# Altium PCB PCB_Dispositivo.PcbDoc
Units mm, origin at the board's own origin, x right, y up, seen from the top; angles counter-clockwise.
Board outline 32.26 x 64.01 mm, 2 copper layers (Top Layer, Bottom Layer); 12 components, 12 nets, 87 pads, 14 vias.
Unrouted connection lines stored in the file: 1.
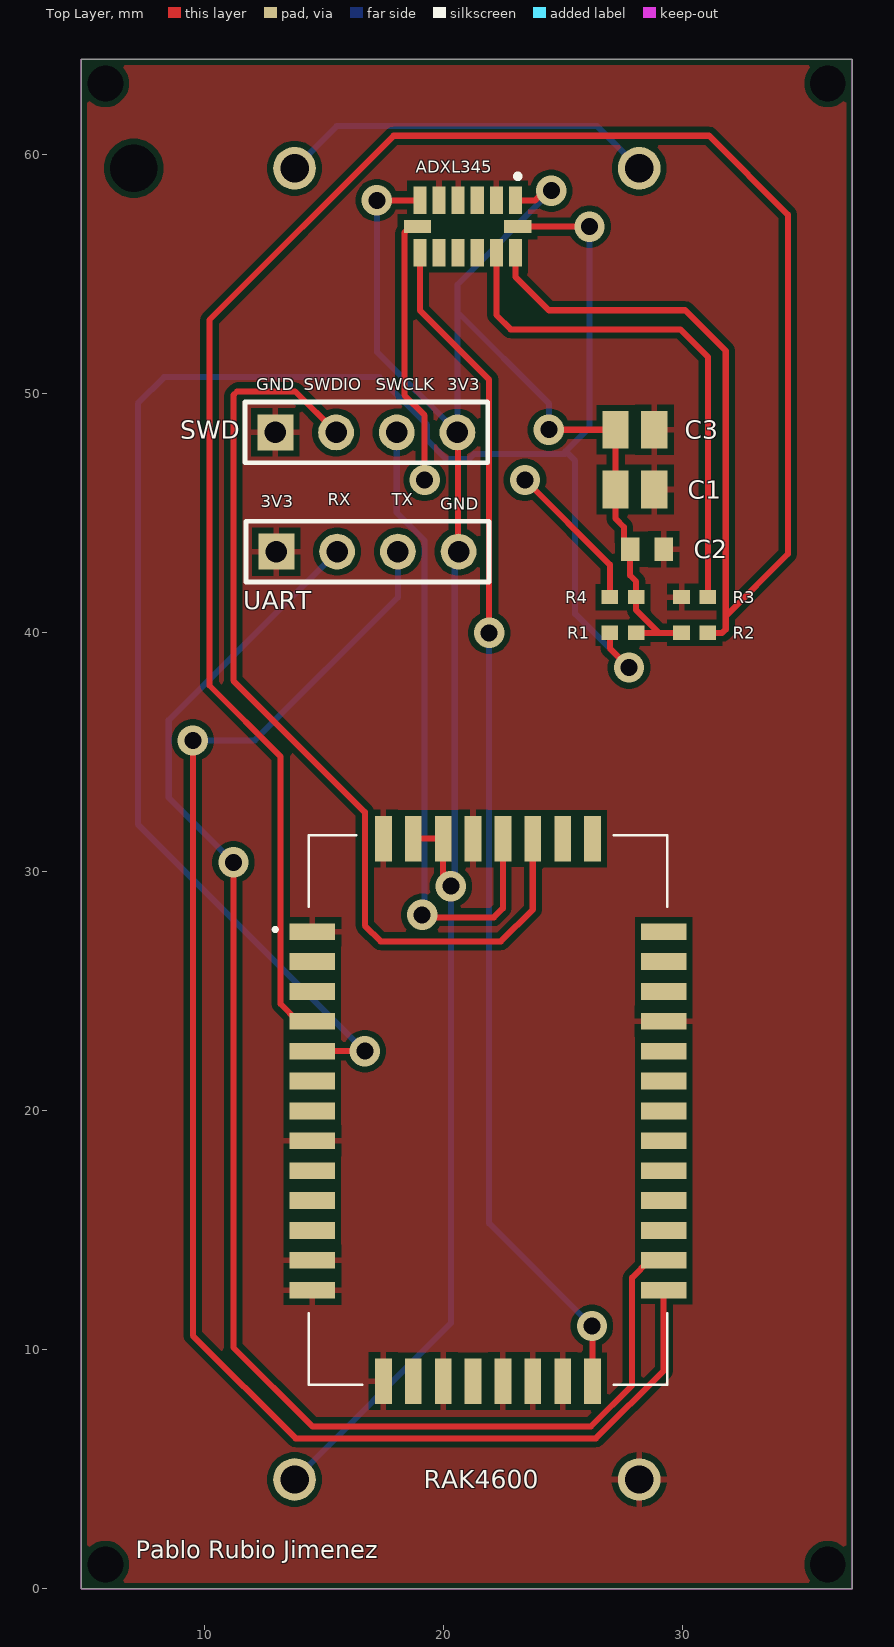
[diagram p0: Top Layer view]
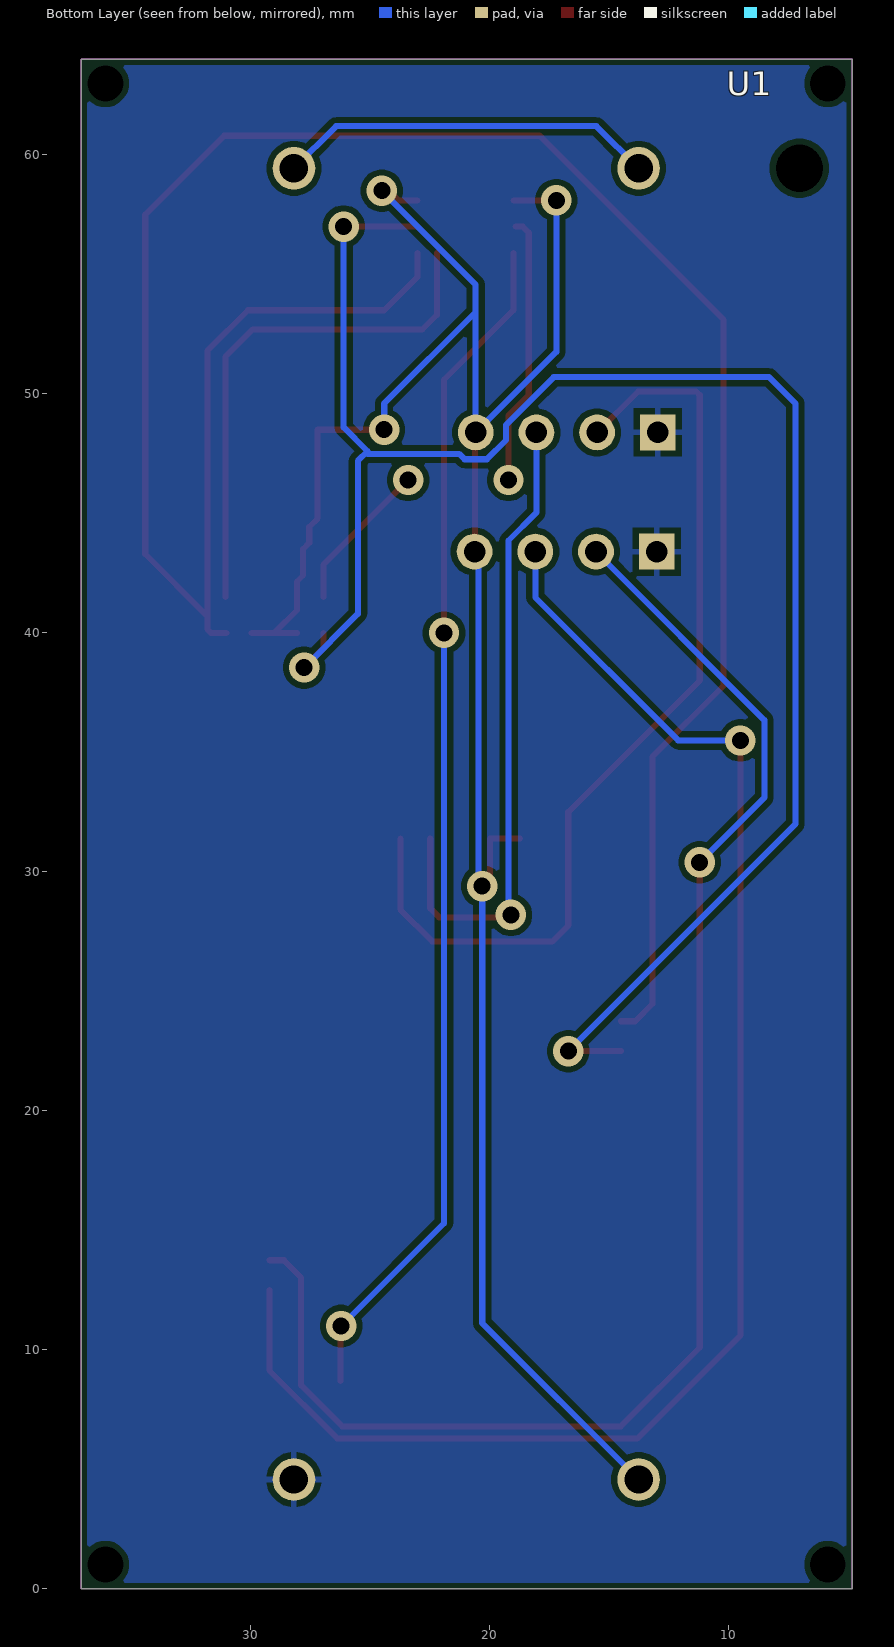
[diagram p1: Bottom Layer view, seen from below]
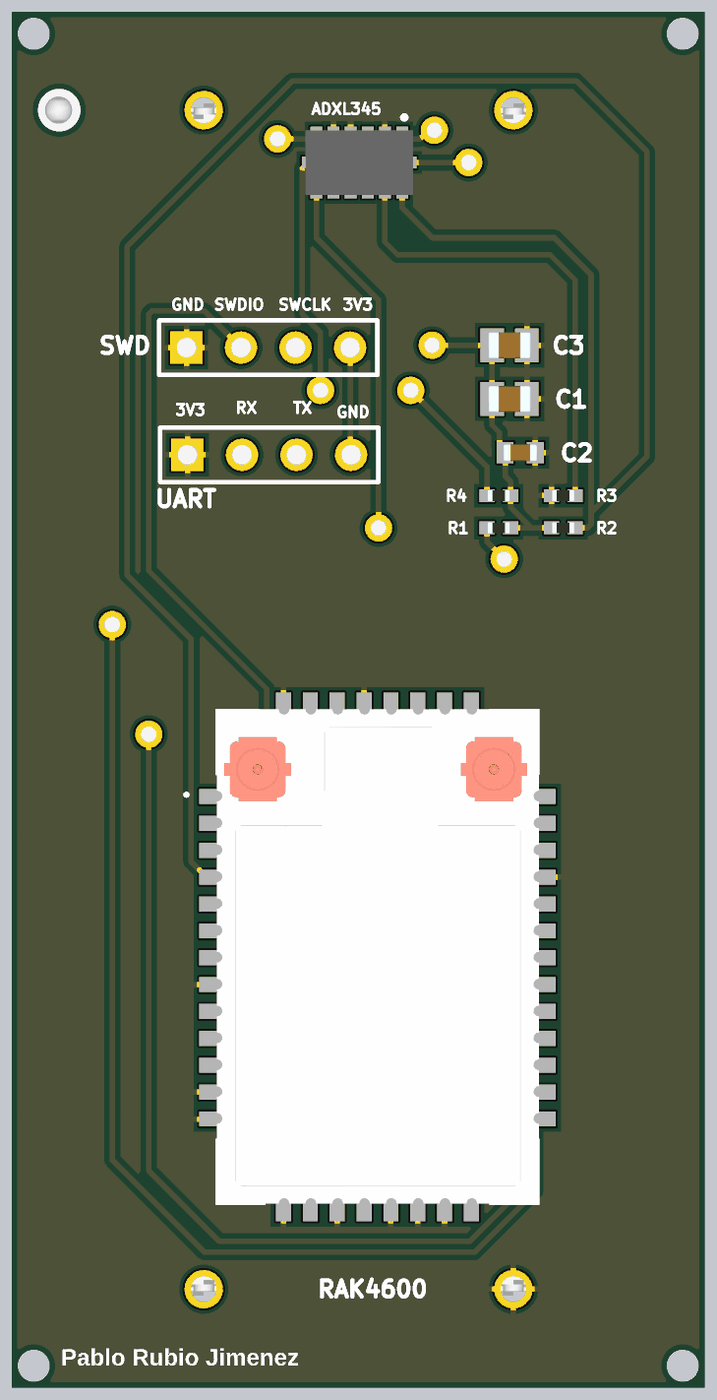
[diagram p2: 3D render of the assembled board from above, using the file's embedded part models]

## Layer stack, top to bottom
Top Solder: solder mask 0.0102, Solder Resist, Dk 3.5
Top Layer: signal copper 0.0356
Dielectric 1: dielectric 0.32, FR-4, Dk 4.8
Bottom Layer: signal copper 0.0356
Bottom Solder: solder mask 0.0102, Solder Resist, Dk 3.5

## Board outline
4.826,1.27 4.826,64.008 37.084,64.008 37.084,0 4.826,0

## Design rules (kind name [scope] priority, off if disabled: settings)
Clearance [All] p1: gap=0.245 ignorepadtopadclearanceinfootprint=FALSE
MinimumSolderMaskSliver [All] p1: minsoldermaskwidth=0.04
PolygonConnect [All] p1: connectstyle=Relief reliefconductorwidth=0.254 reliefentries=4 polygonreliefangle="90 Angle" airgapwidth=0.254
RoutingVias [All] p1: holewidth=0.711 width=1.27 viastyle="Through Hole" minholewidth=0.711 minwidth=1.27 maxholewidth=0.711 maxwidth=1.27
SilkToSolderMaskClearance [IsPad] p1: minsilkscreentomaskgap=0.2 clearancetoexposedcopper=TRUE
SolderMaskExpansion [All] p1: expansion=0.102 istentingtop=FALSE
Width [All] p1: maxlimit=0.254 minlimit=0.254 preferedwidth=0.254
28 further rules are at their usual default settings.

## Classes and differential pairs
component class Esquema_Dispositivo: ADXL345 C1 C2 C3 R1 R2 R3 R4 RAK4600 SWD UART

## Components (designator, comment, footprint, x,y, rotation, side; value= is the part's Value field where it differs from the comment)
ADXL345 "ADXL345BCCZ-RL" ADXL345BCCZRL 21,57 r270 top (schematic designator IC2)
C1 "0.1u" CAPC2012X98N 28,46 r180 top
C2 "10u" CAPC1608X90N 28.5,43.5 r180 top
C3 "0.1u" CAPC2012X98N 28,48.5 r180 top
R1 "10k" RESC1005X35N 27.5,40 r0 top
R2 "10k" RESC1005X35N 30.5,40 r180 top
R3 "10k" RESC1005X35N 30.5,41.5 r0 top
R4 "10k" RESC1005X35N 27.5,41.5 r180 top
RAK4600 "RAK4600" RAK4600 12.214,34.358 r270 top (schematic designator IC1)
SWD "Header 4" HDR1X4 12.954,48.387 r0 top (schematic designator P1)
U1 "1013" 1013 20.968,32.008 r270 bottom
UART "Header 4" HDR1X4 13,43.4 r0 top (schematic designator P2)

## Footprints (in the part's own frame and the unit in brackets; to place one, negate y for a bottom-side part, rotate by r counter-clockwise, add the part's x,y. Pads: shape width x height; smd on the part's side, far side on the other; paste and mask are expansions set on the pad)
1013 [mm]
  round 1.785 hole 1.19: 1(-27.43,7.21) 2(-27.43,-7.21) 3(27.43,-7.21) 4(27.43,7.21)
  round 0.99 hole 1.98 unplated: 5(-27.43,13.94)
  body extent -29.97,-14.99 29.96,14.99, height 15.36
ADXL345BCCZRL [mm]
  rect 1.145x0.55 smd: 1(-1.097,2) 2(-1.097,1.2) 3(-1.097,0.4) 4(-1.097,-0.4) 5(-1.097,-1.2) 6(-1.097,-2) 8(1.097,-2) 9(1.097,-1.2) 10(1.097,-0.4) 11(1.097,0.4) 12(1.097,1.2) 13(1.097,2)
  rect 0.55x1.145 smd: 7(0,-2.098) 14(0,2.098)
  silkscreen extent -2.2,2 -2,2.2, body extent -1.5,-2.5 1.5,2.5, height 1.1
CAPC1608X90N [mm]
  rect 0.78x0.99 smd: 1(-0.7,0) 2(0.7,0)
  body extent -0.8,-0.41 0.8,0.41, height 0.9
CAPC2012X98N [mm]
  rect 1.1x1.57 smd: 1(-0.81,0) 2(0.81,0)
  body extent -1,-0.63 1,0.63, height 0.98
HDR1X4 [mm] "Connector; Header; 4 Position"
  rect 1.5x1.5 hole 0.9: 1(0,0)
  round 1.5 hole 0.9: 2(2.54,0) 3(5.08,0) 4(7.62,0)
  silkscreen extent -1.27,-1.27 8.89,1.27
RAK4600 [mm]
  rect 0.7x1.9 smd: 1(6.858,2.286) 2(8.108,2.286) 3(9.358,2.286) 4(10.608,2.286) 5(11.858,2.286) 6(13.108,2.286) 7(14.358,2.286) 8(15.608,2.286) 9(16.858,2.286) 10(18.108,2.286) 11(19.358,2.286) 12(20.608,2.286) 13(21.858,2.286) 22(21.858,16.986) 23(20.608,16.986) 24(19.358,16.986) 25(18.108,16.986) 26(16.858,16.986) 27(15.608,16.986) 28(14.358,16.986) 29(13.108,16.986) 30(11.858,16.986) 31(10.608,16.986) 32(9.358,16.986) 33(8.108,16.986) 34(6.858,16.986)
  rect 1.9x0.7 smd: 14(25.667,5.261) 15(25.667,6.511) 16(25.667,7.761) 17(25.667,9.011) 18(25.667,10.261) 19(25.667,11.511) 20(25.667,12.761) 21(25.667,14.011) 35(2.967,14.011) 36(2.967,12.761) 37(2.967,11.511) 38(2.967,10.261) 39(2.967,9.011) 40(2.967,7.761) 41(2.967,6.511) 42(2.967,5.261)
  silkscreen extent 2.82,0.69 25.82,17.14, body extent 2.79,2.16 25.79,17.16, height 2.51
RESC1005X35N [mm]
  rect 0.7x0.6 smd: 1(-0.55,0) 2(0.55,0)
  body extent -0.5,-0.25 0.5,0.25, height 0.35

## Part data
ADXL345 RAK4600: "Integrated Circuit"
C1 C3: library part C0805X104M5RACTU, "Capacitor"
C2: library part 0603ZD106KAT2A, "Capacitor"
R1 R2 R3 R4: library part CPF0402B10KE, "Resistor"
SWD UART: "Header, 4-Pin"
U1: "Undefined or Miscellaneous"

## Free pads (board coordinates)
  round 0.99 hole 1.5 unplated: 4(5.842,1.016) 4(5.842,62.992) 4(36.068,1.016) 4(36.068,62.992)

## Via types
v1: diameter 1.27, hole 0.711, Top Layer to Bottom Layer, 14 vias

## Nets (pads, with @x,y where several pads share a name; then routed paths per layer and width w, separated by ;. In a path a pad name is that pad's centre, name@x,y a point inside that pad or via, vN(x,y) a via of type N, cw(c..) or ccw(c..) an arc to the next point about the centre after c; other vN are vias at no path point)
3V3: ADXL345.1 ADXL345.6 C1.2 C2.2 C3.2 R1.2 R2.2 R4.1 RAK4600.40 RAK4600.41 SWD.4 U1.4 UART.4 | length 96.8
  Top Layer w0.254: v1(17.2,58.1) 17.203,58.097 ADXL345.6 ; RAK4600.41 RAK4600.40 19.975,29.725 v1(20.3,29.4) ; SWD.4 20.597,48.364 20.597,43.423 UART.4 ; ADXL345.1 23.822,58.097 24.225,58.5 v1(24.5,58.5) ; v1(24.4,48.5) 25.1,48.5 C3.2 C1.2 27.19,44.778 27.537,44.431 27.537,43.763 C2.2 27.8,42.4 28.05,42.15 R4.1 28.05,40.95 29,40 ; R1.2 29,40 ; R2.2 29,40
  Bottom Layer w0.254: U1.4 20.3,11.119 v1(20.3,29.4) 20.46,29.56 20.46,43.24 UART.4 ; v1(17.2,58.1) 17.2,51.761 SWD.4 20.574,53.426 ; v1(24.4,48.5) 24.4,49.6 20.574,53.426 ; v1(24.5,58.5) 20.574,54.574 20.574,53.426
GND: ADXL345.2 ADXL345.4 ADXL345.5 C1.1 C2.1 C3.1 R3.1 RAK4600.1 RAK4600.8 RAK4600.12 RAK4600.13 RAK4600.14 RAK4600.16 RAK4600.18 RAK4600.19 RAK4600.20 RAK4600.31 RAK4600.39 RAK4600.42 SWD.1 U1.3 UART.1
INT1: ADXL345.8 RAK4600.21 | length 50.2
  Top Layer w0.254: ADXL345.8 19,53.5 21.9,50.6 v1(21.9,40) ; v1(26.2,11) 26.225,10.975 RAK4600.21
  Bottom Layer w0.254: v1(21.9,40) 21.9,15.3 v1(26.2,11)
NetIC2_7: ADXL345.7 R4.2 | length 17.7
  Top Layer w0.254: ADXL345.7 18.605,57 18.353,56.749 18.353,49.947 19.2,49.1 v1(19.2,46.4) ; v1(23.4,46.4) 26.95,42.85 R4.2
NetIC2_12: ADXL345.12 R3.2 | length 22.2
  Top Layer w0.254: ADXL345.12 22.2,53.3 22.8,52.7 29.9,52.7 31.05,51.55 R3.2
NetU1_1: U1.1 U1.2 | length 15.9
  Bottom Layer w0.254: U1.1 15.521,61.2 26.416,61.2 U1.2
RX: RAK4600.22 UART.3 | length 63.9
  Top Layer w0.254: v1(9.5,35.5) 9.5,10.6 13.8,6.3 26.366,6.3 29.2,9.134 RAK4600.22
  Bottom Layer w0.254: v1(9.5,35.5) 12.1,35.5 18.08,41.48 UART.3
SCL: ADXL345.14 R1.1 RAK4600.5 | length 78.2
  Top Layer w0.254: RAK4600.5 v1(16.7,22.5) ; ADXL345.14 v1(26.1,57) ; R1.1 26.95,39.35 v1(27.75,38.55)
  Bottom Layer w0.254: v1(16.7,22.5) 7.2,32 7.2,49.6 8.3,50.7 17.308,50.7 19.304,48.704 19.304,48.07 20.109,47.265 21.039,47.265 21.267,47.493 25.1,47.493 ; v1(26.1,57) 26.1,48.6 25.1,47.6 25.5,47.2 25.5,40.8 v1(27.75,38.55)
SDA: ADXL345.13 R2.1 RAK4600.4 | length 101.8
  Top Layer w0.254: RAK4600.4 13.9,23.75 13.178,24.472 13.178,34.822 10.2,37.8 10.2,53.1 17.9,60.8 31.1,60.8 34.4,57.5 34.4,43.3 31.8,40.7 ; ADXL345.13 23,54.9 24.4,53.5 30.1,53.5 31.8,51.8 31.8,40.7 ; R2.1 31,40 31.65,40 31.8,40.15 31.8,40.7
SWCLK: RAK4600.38 SWD.3 | length 27.2
  Top Layer w0.254: v1(19.1,28.2) 19.2,28.1 22.1,28.1 22.475,28.475 RAK4600.38
  Bottom Layer w0.254: SWD.3 18.034,45.033 19.202,43.865 19.202,28.302 v1(19.1,28.2)
SWDIO: RAK4600.37 SWD.2 | length 40.4
  Top Layer w0.254: SWD.2 13.781,50.1 11.349,50.1 11.2,49.951 11.2,38 16.7,32.5 16.7,27.749 17.356,27.093 22.393,27.093 23.725,28.425 RAK4600.37
TX: RAK4600.23 UART.2 | length 62.2
  Top Layer w0.254: v1(11.2,30.4) 11.2,10.1 14.5,6.8 26.16,6.8 27.878,8.518 27.878,13.028 28.6,13.75 RAK4600.23
  Bottom Layer w0.254: v1(11.2,30.4) 8.493,33.107 8.493,36.353 UART.2
pads on no net: ADXL345.3 ADXL345.9 ADXL345.10 ADXL345.11 RAK4600.2 RAK4600.3 RAK4600.6 RAK4600.7 RAK4600.9 RAK4600.10 RAK4600.11 RAK4600.15 RAK4600.17 RAK4600.24 RAK4600.25 RAK4600.26 RAK4600.27 RAK4600.28 RAK4600.29 RAK4600.30 RAK4600.32 RAK4600.33 RAK4600.34 RAK4600.35 RAK4600.36 U1.5

## Polygon pours and split planes (outlines as drawn)
GND on Top Layer "GND_L01_P000" (solid, pour order 0): 4.826,64.008 4.826,0 37.084,0 37.084,64.008
GND on Bottom Layer "GND_L02_P001" (solid, pour order 1): 4.826,64.008 37.084,64.008 37.084,0 4.826,0 4.826,64.008

## Keep-outs
Keep-Out Layer:
  lines w0: 4.826,0 6.096,0 35.814,0 37.084,0 37.084,1.27 37.084,62.738 37.084,64.008 35.814,64.008 6.604,64.008 5.842,64.008 4.826,64.008 4.826,62.992 4.826,1.27 4.826,0

## Silkscreen, mask and mechanical layers (free items; w line width, h text height)
Top Overlay:
  text "GND" at 12.15,50.15 h0.5
  text "SWDIO" at 14.15,50.15 h0.5
  text "SWCLK" at 17.15,50.15 h0.5
  text "3V3" at 20.15,50.15 h0.5
  text "RX" at 15.15,45.35 h0.5
  text "TX" at 17.834,45.345 h0.5
  text "3V3" at 12.35,45.25 h0.5
  text "GND" at 19.85,45.15 h0.5
  text "Pablo Rubio Jimenez" at 7.112,1.031 h1.25